# Altium PCB Via Stitching.PcbDoc
Units mm, origin at the board's own origin, x right, y up, seen from the top; angles counter-clockwise.
Board outline 80.01 x 48.01 mm, 2 copper layers (Top Layer, Bottom Layer); 52 components, 54 nets, 192 pads, 43 vias.
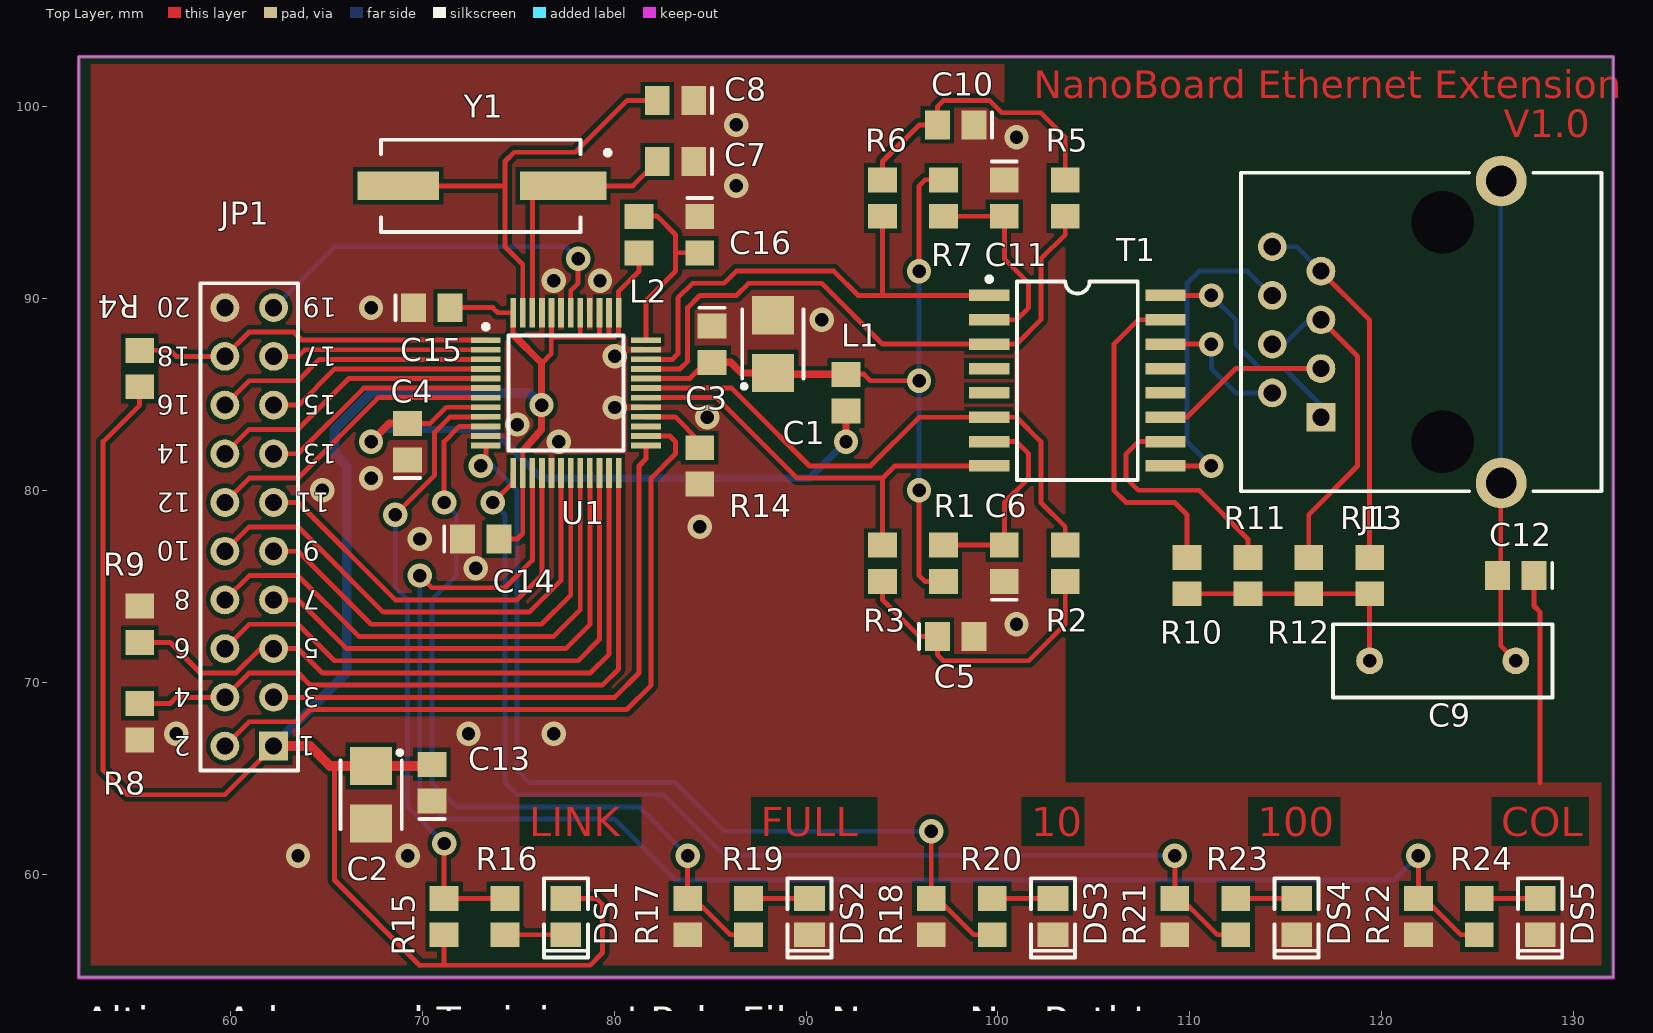
[diagram p0: Top Layer view]
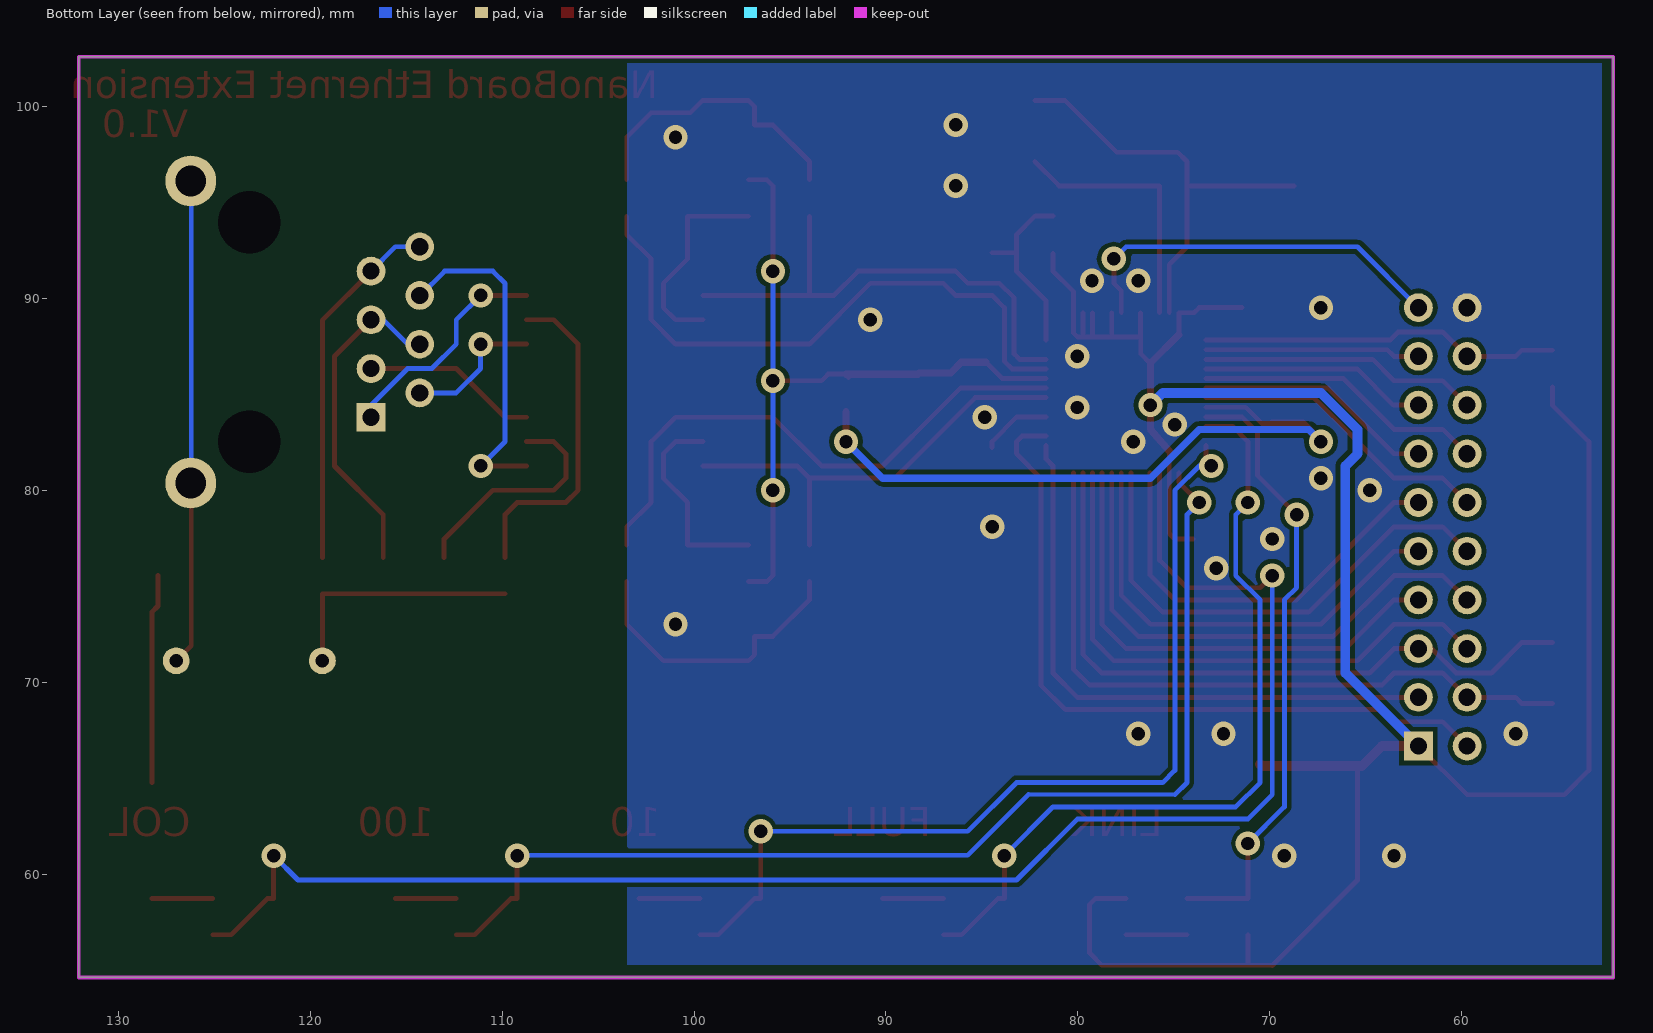
[diagram p1: Bottom Layer view, seen from below]

## Layer stack, top to bottom
Top Solder: solder mask 0.0102, Solder Resist, Dk 3.5
Top Layer: signal copper 0.0356
Dielectric1: dielectric 0.32, FR-4, Dk 4.8
Bottom Layer: signal copper 0.0356
Bottom Solder: solder mask 0.0102, Solder Resist, Dk 3.5

## Board outline
52.07,54.61 52.07,102.616 132.08,102.616 132.08,54.61

## Design rules (kind name [scope] priority, off if disabled: settings)
Clearance Clearance_1 [(HasFootprint('TSQFP50P900X900-48'))] p1: gap=0.2 ignorepadtopadclearanceinfootprint=FALSE except(0: Arc-Hole Track-Hole SMDPad-Hole THPad-Hole Via-Hole Fill-Hole Poly-Hole Region-Hole Text-Hole)
Clearance [All] p2: gap=0.24 ignorepadtopadclearanceinfootprint=FALSE except(0: Arc-Hole Track-Hole SMDPad-Hole THPad-Hole Via-Hole Fill-Hole Poly-Hole Region-Hole Text-Hole)
FabricationTestPointUsage TestPointUsage [All] p1 off: valid=0 allowmultiple=FALSE
FabricationTestpoint Testpoint [All] p1 off: side=3 testpointundercomponent=TRUE minsize=1.016 maxsize=2.54 preferedsize=1.524 minholesize=0 maxholesize=1.016 preferedholesize=0.813 testpointgrid=0.025 allowsidetop=TRUE allowsidebottom=TRUE usegrid=TRUE gridtolerance=0
HoleSize [All] p1: absolutevalues=TRUE maxlimit=3.5 minlimit=0.025 maxpercent=80.000 minpercent=20.000
PolygonConnect [All] p1: connectstyle=Direct reliefconductorwidth=0.254 reliefentries=4 polygonreliefangle="90 Angle" airgapwidth=0.254
RoomDefinition PHY [InComponentClass('PHY')] p1: confinementstyle=ConfineIn formatcopy=TRUE lockcomponents=FALSE outline 52.07,54.61 132.08,54.61 132.08,102.87 52.07,102.87
RoutingVias [All] p1: holewidth=0.7 width=1.27 viastyle="Through Hole" minholewidth=0.7 minwidth=1.27 maxholewidth=0.7 maxwidth=1.27
SilkToSolderMaskClearance SilkscreenOverComponentPads [IsPad] p1: minsilkscreentomaskgap=0.254 clearancetoexposedcopper=TRUE
SolderMaskExpansion [All] p1: expansion=0.102 istentingtop=FALSE
Width Width_1 [(InNet('3V3') OR InNet('GND') OR InNet('PWFBIN') OR InNet('PWFBOUT'))] p1: maxlimit=0.508 minlimit=0.127 preferedwidth=0.254
Width [All] p2: maxlimit=0.254 minlimit=0.254 preferedwidth=0.254
26 further rules are at their usual default settings.

## Components (designator, comment, footprint, x,y, rotation, side; value= is the part's Value field where it differs from the comment)
C1 "22uF 10V" CAPC3528 88.265,87.63 r90 top
C2 "22uF 10V" CAPC3528 67.31,64.135 r270 top
C3 "100nF 50V" CAPC2012 85.09,87.63 r270 top
C4 "100nF 50V" CAPC2012 69.215,82.55 r90 top
C5 "100nF 50V" CAPC2012 97.79,72.39 r0 top
C6 "100nF 50V" CAPC2012 100.33,76.2 r90 top
C7 "20pF 50V" CAPC2012 83.185,97.155 r180 top
C8 "20pF 50V" CAPC2012 83.185,100.33 r180 top
C9 "100pF 3KV" CAPR7_5-3_6x7_5 123.19,71.12 r0 top
C10 "100nF 50V" CAPC2012 97.79,99.06 r180 top
C11 "100nF 50V" CAPC2012 100.33,95.25 r270 top
C12 "100nF 50V" CAPC2012 127,75.565 r180 top
C13 "100nF 50V" CAPC2012 70.485,64.77 r90 top
C14 "100nF 50V" CAPC2012 73.025,77.47 r0 top
C15 "100nF 50V" CAPC2012 70.485,89.535 r0 top
C16 "100nF 50V" CAPC2012 84.455,93.345 r270 top
DS1 "RED" LED2013 77.47,57.785 r90 top
DS2 "RED" LED2013 90.17,57.785 r90 top
DS3 "RED" LED2013 102.87,57.785 r90 top
DS4 "RED" LED2013 115.57,57.785 r90 top
DS5 "RED" LED2013 128.27,57.785 r90 top
J1 "RJ45 HEADER" 95122-2881 120.27,88.265 r90 top
JP1 "2x10 HEADER" HDR2X10 62.23,66.675 r90 top
L1 "30R@100MHz 600mA" INDC2012 92.075,85.09 r270 top
L2 "30R@100MHz 600mA" INDC2012 81.28,93.345 r90 top
R1 "0R 5%" RESC2012 97.155,76.2 r270 top
R2 "50R 1%" RESC2012 103.505,76.2 r270 top
R3 "50R 1%" RESC2012 93.98,76.2 r270 top
R4 "5K1 5%" RESC2012 55.245,86.36 r270 top
R5 "50R 1%" RESC2012 103.505,95.25 r270 top
R6 "50R 1%" RESC2012 93.98,95.25 r270 top
R7 "0R 5%" RESC2012 97.155,95.25 r90 top
R8 "5K1 5%" RESC2012 55.245,67.945 r90 top
R9 "5K1 5%" RESC2012 55.245,73.025 r270 top
R10 "75R 5%" RESC2012 109.855,75.565 r90 top
R11 "75R 5%" RESC2012 113.03,75.565 r90 top
R12 "75R 5%" RESC2012 116.205,75.565 r90 top
R13 "75R 5%" RESC2012 119.38,75.565 r90 top
R14 "2K 1%" RESC2012 84.455,81.28 r90 top
R15 "5K1 5%" RESC2012 71.12,57.785 r270 top
R16 "510R 5%" RESC2012 74.295,57.785 r270 top
R17 "5K1 5%" RESC2012 83.82,57.785 r90 top
R18 "5K1 5%" RESC2012 96.52,57.785 r270 top
R19 "510R 5%" RESC2012 86.995,57.785 r90 top
R20 "510R 5%" RESC2012 99.695,57.785 r90 top
R21 "5K1 5%" RESC2012 109.22,57.785 r90 top
R22 "5K1 5%" RESC2012 121.92,57.785 r270 top
R23 "510R 5%" RESC2012 112.395,57.785 r90 top
R24 "510R 5%" RESC2012 125.095,57.785 r90 top
T1 "TS6121C" SOIC127P910-16 104.14,85.725 r270 top
U1 "RTL8201CL" TSQFP50P900X900-48 77.47,85.09 r0 top
Y1 "25MHz" "XTAL_HC49SMD 20Mhz  +/-30ppm 20pf" 73.025,95.885 r180 top

## Footprints (in the part's own frame and the unit in brackets; to place one, negate y for a bottom-side part, rotate by r counter-clockwise, add the part's x,y. Pads: shape width x height; smd on the part's side, far side on the other; paste and mask are expansions set on the pad)
95122-2881 [mm]
  rect 1.5x1.5 hole 0.9: 1(-4.445,3.43)
  round 1.5 hole 0.9: 2(-3.175,5.97) 3(-1.905,3.43) 4(-0.635,5.97) 5(0.635,3.43) 6(1.905,5.97) 7(3.175,3.43) 8(4.445,5.97)
  round 2.65 hole 1.6: MH1(-7.875,-5.97) MH2(7.875,-5.97)
  round 2.95 hole 3.25 unplated: MH3(-5.715,-2.92) MH4(5.715,-2.92)
  silkscreen extent -8.3,-11.2 8.3,7.6
CAPC2012 [mm]
  rect 1.3x1.5 smd: 1(-0.95,0) 2(0.95,0)
  silkscreen extent -1.9,-0.65 -1.9,0.65
CAPC3528 [mm]
  rect 2x2.2 smd: 1(-1.5,0) 2(1.5,0)
  silkscreen extent -2.3,-1.6 1.8,1.6
CAPR7_5-3_6x7_5 [mm]
  round 1.4 hole 0.7: 1(-3.81,0) 2(3.81,0)
  silkscreen extent -5.71,-1.91 5.71,1.91
HDR2X10 [mm]
  rect 1.5x1.5 hole 0.9: 1(0,0)
  round 1.5 hole 0.9: 2(0,2.54) 3(2.54,0) 4(2.54,2.54) 5(5.08,0) 6(5.08,2.54) 7(7.62,0) 8(7.62,2.54) 9(10.16,0) 10(10.16,2.54) 11(12.7,0) 12(12.7,2.54) 13(15.24,0) 14(15.24,2.54) 15(17.78,0) 16(17.78,2.54) 17(20.32,0) 18(20.32,2.54) 19(22.86,0) 20(22.86,2.54)
  silkscreen extent -1.27,-1.27 24.13,3.81
INDC2012 [mm]
  rect 1.3x1.5 smd: 1(-0.95,0) 2(0.95,0)
LED2013 [mm]
  rect 1.3x1.6 smd: 1(0.95,0) 2(-0.95,0)
  silkscreen extent -2.13,-1.15 2,1.15
RESC2012 [mm]
  rect 1.3x1.5 smd: 1(-0.95,0) 2(0.95,0)
SOIC127P910-16 [mm]
  rect 0.6x2.1 smd: 1(-4.445,-4.6) 2(-3.175,-4.6) 3(-1.905,-4.6) 4(-0.635,-4.6) 5(0.635,-4.6) 6(1.905,-4.6) 7(3.175,-4.6) 8(4.445,-4.6) 9(4.445,4.6) 10(3.175,4.6) 11(1.905,4.6) 12(0.635,4.6) 13(-0.635,4.6) 14(-1.905,4.6) 15(-3.175,4.6) 16(-4.445,4.6)
  silkscreen extent -5.42,-4.72 5.17,3.15
TSQFP50P900X900-48 [mm]
  rect 1.55x0.3 smd: 1(-4.175,2.75) 2(-4.175,2.25) 3(-4.175,1.75) 4(-4.175,1.25) 5(-4.175,0.75) 6(-4.175,0.25) 7(-4.175,-0.25) 8(-4.175,-0.75) 9(-4.175,-1.25) 10(-4.175,-1.75) 11(-4.175,-2.25) 12(-4.175,-2.75) 25(4.175,-2.75) 26(4.175,-2.25) 27(4.175,-1.75) 28(4.175,-1.25) 29(4.175,-0.75) 30(4.175,-0.25) 31(4.175,0.25) 32(4.175,0.75) 33(4.175,1.25) 34(4.175,1.75) 35(4.175,2.25) 36(4.175,2.75)
  rect 0.3x1.55 smd: 13(-2.75,-4.175) 14(-2.25,-4.175) 15(-1.75,-4.175) 16(-1.25,-4.175) 17(-0.75,-4.175) 18(-0.25,-4.175) 19(0.25,-4.175) 20(0.75,-4.175) 21(1.25,-4.175) 22(1.75,-4.175) 23(2.25,-4.175) 24(2.75,-4.175) 37(2.75,4.175) 38(2.25,4.175) 39(1.75,4.175) 40(1.25,4.175) 41(0.75,4.175) 42(0.25,4.175) 43(-0.25,4.175) 44(-0.75,4.175) 45(-1.25,4.175) 46(-1.75,4.175) 47(-2.25,4.175) 48(-2.75,4.175)
  silkscreen extent -4.3,-3 3,3.57
"XTAL_HC49SMD 20Mhz  +/-30ppm 20pf" [mm]
  rect 4.5x1.5 smd: 1(-4.3,0)
  rect 4.25x1.5 smd: 2(4.3,0)
  silkscreen extent -6.75,-2.4 5.2,2.4

## Part data
C1 C2: library part "Cap Pol1", "Polarized Capacitor (Radial)"
C3 C4 C5 C6 C7 C8 C9 C10 C11 C12 C13 C14 C15 C16: library part Cap, "Capacitor"
DS1 DS2 DS3 DS4 DS5: library part LED3, "Fairchild LED RED"
J1: library part 95122-2881, "Right Angle, Standard Profile, External Shield PCB Jack"
JP1: library part "Header 10X2", "Header, 10-Pin, Dual row"
L1 L2: library part Inductor, "Inductor Ferroxcube"
R1 R2 R3 R4 R5 R6 R7 R8 R9 R10 R11 R12 R13 R14 R15 R16 R17 R18 R19 R20 R21 R22 R23 R24: library part Res2, "Resistor"
T1: "Bothhand 10/100 BaseT Pulse Transformer"
U1: "Realtek Ethernet PHY tranceiver"
Y1: library part XTAL, "Crystal Oscillator"

## Via types
v1: diameter 1.27, hole 0.7, Top Layer to Bottom Layer, 43 vias

## Nets (pads, with @x,y where several pads share a name; then routed paths per layer and width w, separated by ;. In a path a pad name is that pad's centre, name@x,y a point inside that pad or via, vN(x,y) a via of type N, cw(c..) or ccw(c..) an arc to the next point about the centre after c; other vN are vias at no path point)
3V3: C2.1 C13.2 C14.2 C15.2 DS1.1 JP1.1 L2.1 R4.2 R15.2 U1.14 U1.37 U1.38 U1.39 U1.41 U1.44 U1.48 | length 130.3
  Top Layer w0.254: R4.2 55.245,84.455 53.34,82.55 53.34,65.405 54.61,64.135 59.69,64.135 JP1.1 ; 65.405,65.635 65.405,59.69 69.85,55.235 78.74,55.245 79.37,55.885 79.37,58.42 79.055,58.735 DS1.1 ; 71.12,55.255 R15.2 ; C15.2 73.66,89.535 73.93,89.265 U1.48 74.72,88.124 ; C14.2 74.93,77.47 75.22,77.76 U1.14 75.22,82.056 ; 76.2,86.614 76.708,87.122 76.708,88.011 80.01,88.011 80.22,88.221 80.22,90.38 81.28,91.44 L2.1@81.28,92.37 ; 76.72,88.023 U1.44 ; 78.22,88.023 U1.41 ; 79.22,88.039 U1.39 ; 79.72,88.047 U1.38
  Top Layer w0.381: 74.72,88.124 76.2,86.644 76.2,83.185 75.22,82.056
  Top Layer w0.508: JP1.1 64.135,66.675 65.175,65.635 70.4,65.635 C13.2
  Bottom Layer w0.508: JP1.1 66.04,70.485 66.04,81.28 65.405,81.915 65.405,83.185 67.31,85.09 75.565,85.09 v1(76.2,84.455)
3V3A: C16.2 L2.2 U1.36 | length 9.7
  Top Layer w0.254: L2.2@81.28,94.32 82.21,94.32 83.185,93.345 83.185,91.44 81.645,89.9 U1.36 ; 83.19,92.395 C16.2
COL: JP1.18 R4.1 U1.1 | length 18.9
  Top Layer w0.254: R4.1@55.245,87.315 56.83,87.315 57.15,86.995 JP1.18 60.96,88.265 63.285,88.265 63.71,87.84 U1.1
CRS: JP1.5 R9.2 U1.23 | length 36
  Top Layer w0.254: R9.2 56.83,72.075 58.42,70.485 60.261,70.485 61.531,71.755 JP1.5 63.5,71.755 64.77,70.485 78.74,70.485 79.72,71.465 U1.23
GND: C1.2 C2.2 C3.1 C4.1 C5.2 C6.1 C7.1 C8.1 C10.1 C11.1 C12.1 C13.1 C14.1 C15.1 C16.1 DS2.2 DS3.2 DS4.2 DS5.2 JP1.20 R8.1 R9.1 R14.1 R17.1 R18.2 R21.1 R22.2 U1.11 U1.17 U1.29 U1.35 U1.40 U1.43 U1.45 | length 10.9
  Top Layer w0.254: C12.1 127.95,73.98 128.27,73.66 128.27,64.77
  other v1: 63.5,60.96 69.215,60.96 57.15,67.31 72.39,67.31 76.835,67.31 100.965,73.025 72.771,75.946 69.85,77.47 84.455,78.105 64.77,80.01 67.31,80.645 77.089,82.55 74.93,83.439 84.836,83.82 80.01,84.328 80.01,86.995 90.805,88.9 67.31,89.535 76.835,90.932 79.248,90.932 86.36,95.885 100.965,98.425 86.36,99.06
LED0: R15.1 R16.1 U1.9 | length 32.4
  Top Layer w0.254: v1(68.58,78.74) 70.628,80.788 70.628,83.034 71.434,83.84 U1.9 ; v1(71.12,61.595) R15.1 R16.1
  Bottom Layer w0.254: v1(68.58,78.74) 68.58,74.93 69.215,74.295 69.215,63.5 v1(71.12,61.595)
LED1: R17.2 R19.1 U1.10 | length 42.2
  Top Layer w0.254: v1@71.122,79.377 71.122,82.552 71.91,83.34 U1.10 ; v1(83.82,60.96) R17.2 84.14,58.735 86.04,56.835 R19.1
  Bottom Layer w0.254: v1(71.12,79.375) 71.755,78.74 71.755,75.565 70.485,74.295 70.485,64.77 71.755,63.5 81.28,63.5 v1(83.82,60.96)
LED2: R18.1 R20.1 U1.12 | length 48.6
  Top Layer w0.254: v1(73.025,81.28) 73.295,81.55 U1.12 ; v1(96.52,62.23) R18.1 96.835,58.735 98.735,56.835 R20.1
  Bottom Layer w0.254: v1(73.025,81.28) 73.66,81.28 74.93,80.01 74.93,65.405 75.565,64.77 83.185,64.77 85.725,62.23 v1(96.52,62.23)
LED3: R21.2 R23.1 U1.13 | length 59.5
  Top Layer w0.254: v1(73.66,79.375) 74.72,80.435 U1.13 ; v1(109.22,60.96) R21.2 109.54,58.735 111.44,56.835 R23.1
  Bottom Layer w0.254: v1(73.66,79.375) 74.295,78.74 74.295,64.77 74.93,64.135 82.55,64.163 85.725,60.988 v1(109.22,60.96)
LED4: R22.1 R24.1 U1.15 | length 83.3
  Top Layer w0.254: v1(69.85,75.565) 70.485,74.93 74.295,74.93 75.72,76.355 U1.15 ; v1(121.92,60.96) R22.1 122.235,58.735 124.135,56.835 R24.1
  Bottom Layer w0.254: v1(69.85,75.565) 69.85,64.135 71.12,62.865 80.01,62.865 83.185,59.69 120.65,59.69 v1(121.92,60.96)
MDC: JP1.3 U1.25 | length 31.6
  Top Layer w0.254: JP1.3 80.01,69.215 81.28,70.485 81.28,81.28 81.645,81.645 U1.25
MDIO: JP1.2 U1.26 | length 38.4
  Top Layer w0.254: JP1.2 60.96,67.945 63.5,67.945 64.135,68.58 80.645,68.58 81.915,69.85 81.915,80.645 83.185,81.915 83.185,82.55 82.895,82.84 U1.26
NetC5_1: C5.1 R2.2 R3.2 | length 15.4
  Top Layer w0.254: R3.2 93.98,74.295 95.885,72.39 C5.1 96.84,71.435 97.155,71.12 101.6,71.12 103.505,73.025 R2.2
NetC6_2: C6.2 R1.1 T1.7 | length 10.8
  Top Layer w0.254: R1.1 C6.2 100.33,79.375 101.6,80.645 101.6,81.915 100.965,82.55 T1.7
NetC7_2: C7.2 U1.46 Y1.1 | length 13.7
  Top Layer w0.254: U1.46 75.72,95.885 80.965,95.885 C7.2
NetC8_2: C8.2 U1.47 Y1.2 | length 23.1
  Top Layer w0.254: Y1.2 74.295,95.885 ; U1.47 75.22,91.785 74.295,92.71 74.295,97.155 74.775,97.635 77.95,97.635 80.645,100.33 C8.2
NetC9_1: C9.1 R10.1 R11.1 R12.1 R13.1 | length 13
  Top Layer w0.254: R10.1 R13.1 C9.1
NetC9_2: C9.2 C12.2 J1.MH1 J1.MH2 | length 25.3
  Top Layer w0.254: J1.MH1@126.215,80.39 126.215,71.905 C9.2
  Bottom Layer w0.254: J1.MH1@126.215,80.39 J1.MH2@126.215,96.14
NetC10_2: C10.2 R5.1 R6.1 | length 15.4
  Top Layer w0.254: R6.1 93.98,97.155 95.885,99.06 C10.2 96.84,100.015 97.155,100.33 99.568,100.33 100.203,99.695 102.235,99.695 103.505,98.425 R5.1
NetC11_2: C11.2 R7.1 T1.2 | length 10.8
  Top Layer w0.254: R7.1 C11.2 100.33,92.075 101.6,90.805 101.6,89.535 100.965,88.9 T1.2
NetDS1_2: DS1.2 R16.2 | length 3.2
  Top Layer w0.254: R16.2 DS1.2
NetDS2_1: DS2.1 R19.2 | length 3.2
  Top Layer w0.254: R19.2 DS2.1
NetDS3_1: DS3.1 R20.2 | length 3.2
  Top Layer w0.254: R20.2 DS3.1
NetDS4_1: DS4.1 R23.2 | length 3.2
  Top Layer w0.254: R23.2 DS4.1
NetDS5_1: DS5.1 R24.2 | length 3.2
  Top Layer w0.254: R24.2 DS5.1
NetJ1_1: J1.1 T1.16 | length 11.8
  Top Layer w0.254: T1.16 v1(111.125,90.17)
  Bottom Layer w0.254: v1(111.125,90.17) 112.395,88.9 112.395,87.63 113.665,86.36 114.935,86.36 116.815,84.48 J1.1@116.815,83.82
NetJ1_2: J1.2 T1.14 | length 7.3
  Top Layer w0.254: T1.14 v1(111.125,87.63)
  Bottom Layer w0.254: v1(111.125,87.63) 111.125,86.36 112.395,85.09 J1.2@114.275,85.09
NetJ1_3: J1.3 T1.11 | length 9.1
  Top Layer w0.254: T1.11 109.855,83.82 112.395,86.36 J1.3@116.815,86.36
NetJ1_4: J1.4 J1.5 R12.2 | length 16.7
  Top Layer w0.254: R12.2 116.205,78.74 118.745,81.28 118.745,86.995 J1.5
  Bottom Layer w0.254: J1.4@114.275,87.63 114.935,87.63 J1.5@116.205,88.9
NetJ1_6: J1.6 T1.9 | length 17.6
  Top Layer w0.254: T1.9 v1(111.125,81.28)
  Bottom Layer w0.254: v1(111.125,81.28) 109.855,82.55 109.855,90.805 110.49,91.44 113.005,91.44 J1.6@114.275,90.17
NetJ1_7: J1.7 J1.8 R13.2 | length 19
  Top Layer w0.254: J1.7@116.815,91.44 119.38,88.875 R13.2
  Bottom Layer w0.254: J1.8@114.275,92.71 115.57,92.71 J1.7@116.815,91.465
NetR2_1: R2.1 T1.6 U1.31 | length 29.8
  Top Layer w0.254: U1.31 86.11,85.34 86.995,84.455 90.17,81.28 93.345,81.28 95.885,83.82 T1.6 100.965,83.82 102.235,82.55 102.235,79.375 103.505,78.105 R2.1
NetR3_1: R3.1 T1.8 U1.30 | length 23.4
  Top Layer w0.254: U1.30 85.34,84.84 89.535,80.645 93.98,80.645 ; R3.1 93.98,80.645 ; T1.8 94.615,81.28 93.98,80.645
NetR5_2: R5.2 T1.3 U1.33 | length 31.8
  Top Layer w0.254: U1.33 83.419,86.34 83.82,86.741 83.82,89.535 84.455,90.17 86.36,90.17 86.995,90.805 90.805,90.805 93.98,87.63 T1.3 100.965,87.63 102.235,88.9 102.235,92.075 103.505,93.345 R5.2
NetR6_2: R6.2 T1.1 U1.34 | length 26.2
  Top Layer w0.254: U1.34 83.03,86.84 83.312,87.122 83.312,90.043 84.074,90.805 85.725,90.805 86.36,91.44 91.44,91.44 92.71,90.17 T1.1 ; 93.98,90.17 R6.2
NetR10_2: R10.2 T1.15 | length 17.4
  Top Layer w0.254: T1.15 107.315,88.9 106.045,87.63 106.045,80.01 106.68,79.375 109.22,79.375 109.855,78.74 R10.2
NetR11_2: R11.2 T1.10 | length 12.2
  Top Layer w0.254: T1.10 107.315,82.55 106.68,81.915 106.68,80.645 107.315,80.01 110.49,80.01 113.03,77.47 R11.2
NetR14_2: R14.2 U1.28 | length 3.7
  Top Layer w0.254: U1.28 83.165,83.84 84.455,82.55 R14.2
PWFBIN: C4.2 L1.2 U1.8 | length 35.2
  Top Layer w0.254: C4.2@69.85,83.5 70.395,83.5 71.235,84.34 U1.8
  Top Layer w0.381: v1(67.31,82.55) 68.26,83.5 C4.2@69.85,83.5 ; v1(92.075,82.55) L1.2@92.075,84.115
  Bottom Layer w0.381: v1(67.31,82.55) 67.945,83.185 73.66,83.185 76.2,80.645 90.17,80.645 v1(92.075,82.55)
PWFBOUT: C1.1 C3.2 L1.1 R1.2 R7.2 U1.32 | length 38.1
  Top Layer w0.254: U1.32 83.935,85.84 C3.2@84.775,86.68 ; C1.1 C1.1@88.33,86.065 ; L1.1@91.931,85.876 L1.1@91.948,85.893 ; L1.1@92.075,86.065 93.005,86.065 93.345,85.725 v1(95.885,85.725) ; v1(95.885,80.01) 95.885,75.565 96.2,75.25 R1.2 ; v1(95.885,91.44) 95.885,95.885 96.2,96.2 R7.2
  Top Layer w0.381: C3.2@84.775,86.68 86.066,86.68 86.616,86.13 C1.1 ; C1.1@88.33,86.065 L1.1@92.075,86.065
  Bottom Layer w0.254: v1(95.885,80.01) v1(95.885,91.44)
RESETB: JP1.19 U1.42 | length 20.4
  Top Layer w0.254: U1.42 77.72,90.42 78.105,90.805 v1(78.105,92.075)
  Bottom Layer w0.254: JP1.19 65.405,92.71 77.47,92.71 v1(78.105,92.075)
RXC: JP1.11 U1.16 | length 22
  Top Layer w0.254: JP1.11 63.5,79.375 68.58,74.295 74.93,74.295 76.22,75.585 U1.16
RXD0: JP1.7 U1.21 | length 26
  Top Layer w0.254: JP1.7 63.5,74.295 66.04,71.755 77.47,71.755 78.72,73.005 U1.21
RXD1: JP1.8 U1.20 | length 28.1
  Top Layer w0.254: JP1.8 60.96,75.565 63.5,75.565 66.675,72.39 76.835,72.39 78.22,73.775 U1.20
RXD2: JP1.9 U1.19 | length 24.1
  Top Layer w0.254: JP1.9 63.5,76.835 67.31,73.025 76.2,73.025 77.72,74.545 U1.19
RXD3: JP1.10 U1.18 | length 26.2
  Top Layer w0.254: JP1.10 60.96,78.105 63.5,78.105 67.945,73.66 75.565,73.66 77.22,75.315 U1.18
RXDV: JP1.6 U1.22 | length 30
  Top Layer w0.254: JP1.6 60.96,73.025 63.5,73.025 65.405,71.12 78.105,71.12 79.22,72.235 U1.22
RXER: JP1.4 R8.2 U1.24 | length 36.5
  Top Layer w0.254: R8.2 56.835,68.895 57.155,69.215 JP1.4 60.96,70.485 63.5,70.485 64.135,69.85 79.375,69.85 80.22,70.695 U1.24
TXC: JP1.12 U1.7 | length 15.9
  Top Layer w0.254: JP1.12 60.96,80.645 63.5,80.645 67.695,84.84 U1.7
TXD0: JP1.13 U1.6 | length 12.5
  Top Layer w0.254: JP1.13 63.5,81.915 66.925,85.34 U1.6
TXD1: JP1.14 U1.5 | length 15.2
  Top Layer w0.254: JP1.14 60.96,83.185 63.5,83.185 66.155,85.84 U1.5
TXD2: JP1.15 U1.4 | length 11.8
  Top Layer w0.254: JP1.15 63.54,84.455 65.425,86.34 U1.4
TXD3: JP1.16 U1.3 | length 14.6
  Top Layer w0.254: JP1.16 60.96,85.725 63.5,85.725 64.615,86.84 U1.3
TXEN: JP1.17 U1.2 | length 11.2
  Top Layer w0.254: JP1.17 63.5,86.995 63.845,87.34 U1.2
pads on no net: J1.MH3 J1.MH4 T1.4 T1.5 T1.12 T1.13 U1.27

## Polygon pours and split planes (outlines as drawn)
GND on Top Layer "Top Layer-GND" (solid, remove dead copper, pour order 1000): 52.705,102.235 100.33,102.235 100.33,99.695 102.87,99.695 103.505,99.06 103.505,64.77 131.445,64.77 131.445,55.245 52.705,55.245
GND on Bottom Layer "Bottom Layer-GND" (solid, remove dead copper, pour order 1001): 52.68,102.27 103.48,102.27 103.48,55.28 52.68,55.28

## Keep-outs
Keep-Out Layer:
  the board outline again, w0.2

## Other copper
Top Layer:
  text "NanoBoard Ethernet Extension" at 101.854,100.457 h1.45
  text "V1.0" at 126.365,98.425 h1.45
  text "LINK" at 75.565,61.976 h1.52
  text "FULL" at 87.63,61.976 h1.52
  text "10" at 101.727,61.976 h1.52
  text "100" at 113.538,61.976 h1.52
  text "COL" at 126.238,61.976 h1.52

## Silkscreen, mask and mechanical layers (free items; w line width, h text height)
Top Overlay:
  text "Altium Advanced Training: '.Pcb_File_Name_No_Path'" at 52.324,51.562 h1.52
Mechanical 1:
  the board outline again, w0.2
Via Stitching Constraint Area:
  lines w0.5: 51.435,53.975 52.705,55.245 ; 51.435,103.505 52.705,102.235 ; 52.705,50.165 52.705,55.245 ; 52.705,107.315 52.705,102.235 ; 53.975,53.975 52.705,55.245 ; 53.975,103.505 52.705,102.235 ; 102.235,53.975 103.505,55.245 ; 102.235,103.505 103.505,102.235 ; 103.505,50.165 103.505,55.245 ; 103.505,107.315 103.505,102.235 ; 104.775,53.975 103.505,55.245 ; 104.775,103.505 103.505,102.235
  text "ViaStitching Constraint Area" at 42.545,108.585 h0.75
Drill Drawing:
  text ".Legend" at 137.16,54.61 h1.52

## Dimensions
52.07,102.616 to 52.07,54.61 on Top Layer
52.07,54.61 to 132.08,54.61 on Top Layer

## Text inside footprints (layer, text, board x,y; h text height)
JP1: Top Overlay "18" at 57.912,87.503 h1 r180; Top Overlay "17" at 65.532,87.503 h1 r180; Top Overlay "14" at 57.912,82.423 h1 r180; Top Overlay "13" at 65.532,82.423 h1 r180; Top Overlay "10" at 57.912,77.343 h1 r180; Top Overlay "9" at 64.643,77.343 h1 r180; Top Overlay "8" at 57.912,74.803 h1 r180; Top Overlay "7" at 64.643,74.803 h1 r180; Top Overlay "4" at 57.912,69.723 h1 r180; Top Overlay "3" at 64.643,69.723 h1 r180; Top Overlay "5" at 64.643,72.263 h1 r180; Top Overlay "11" at 65.151,79.883 h1 r180; Top Overlay "15" at 65.532,84.963 h1 r180; Top Overlay "6" at 57.912,72.263 h1 r180; Top Overlay "12" at 57.912,79.883 h1 r180; Top Overlay "16" at 57.912,84.963 h1 r180; Top Overlay "20" at 57.912,90.043 h1 r180; Top Overlay "19" at 65.532,90.043 h1 r180; Top Overlay "1" at 64.389,67.183 h1 r180; Top Overlay "2" at 57.912,67.183 h1 r180